# EAGLE board LoPoSwitch-BLE (EAGLE 6.6.0)
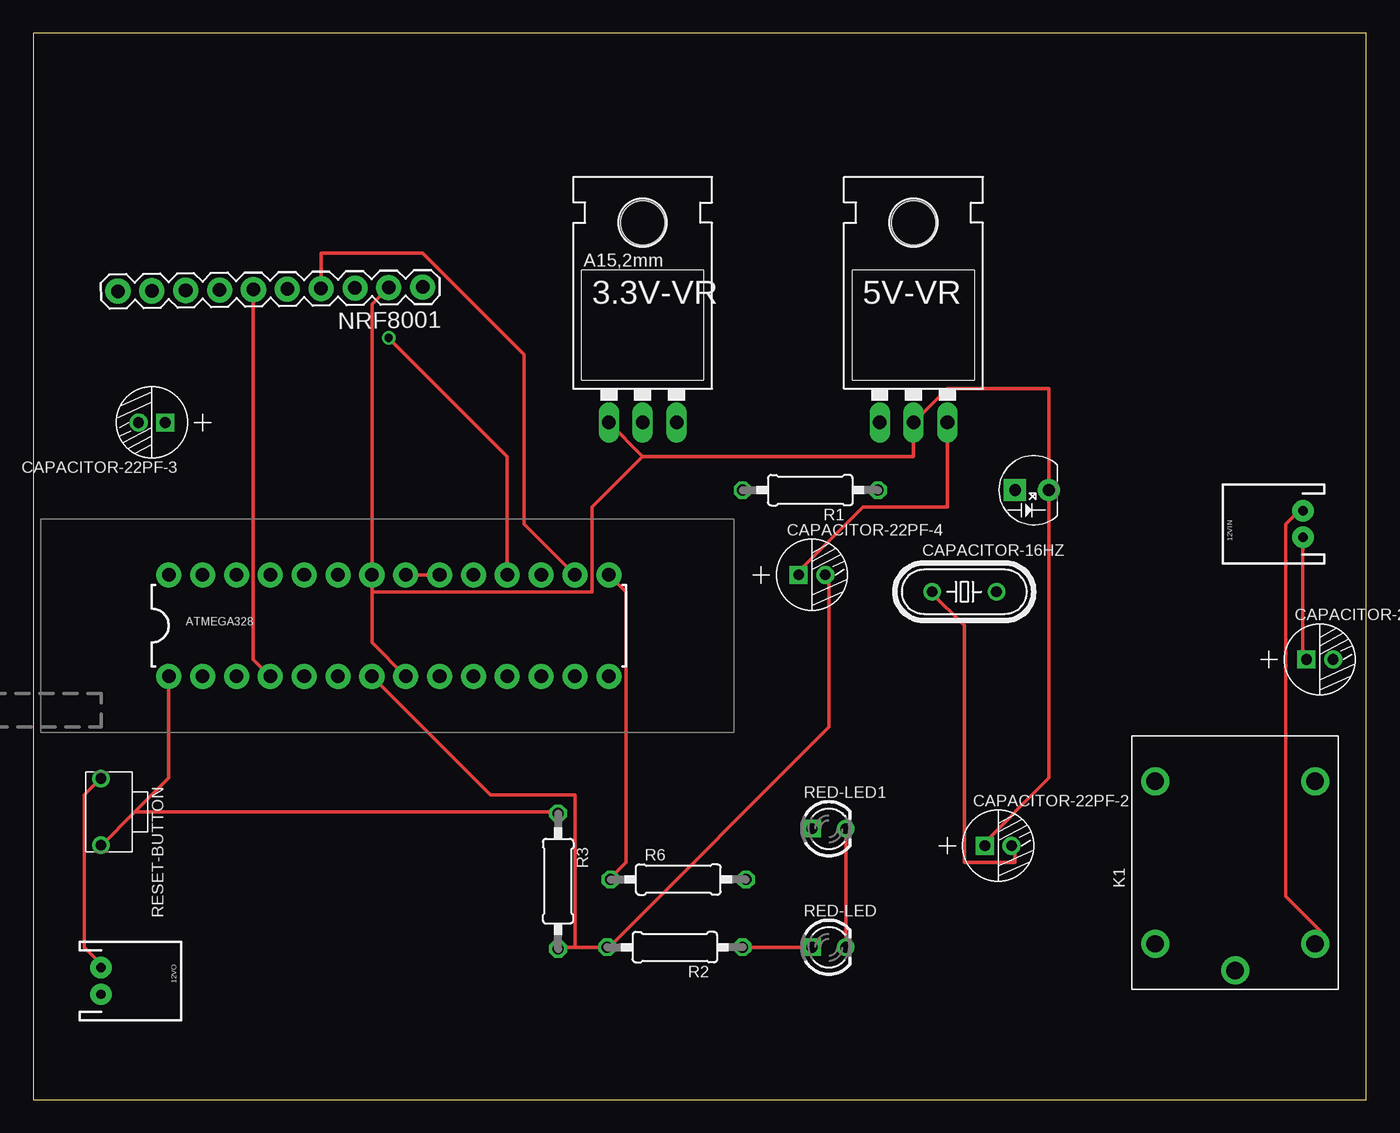
[diagram p0: board, top side]
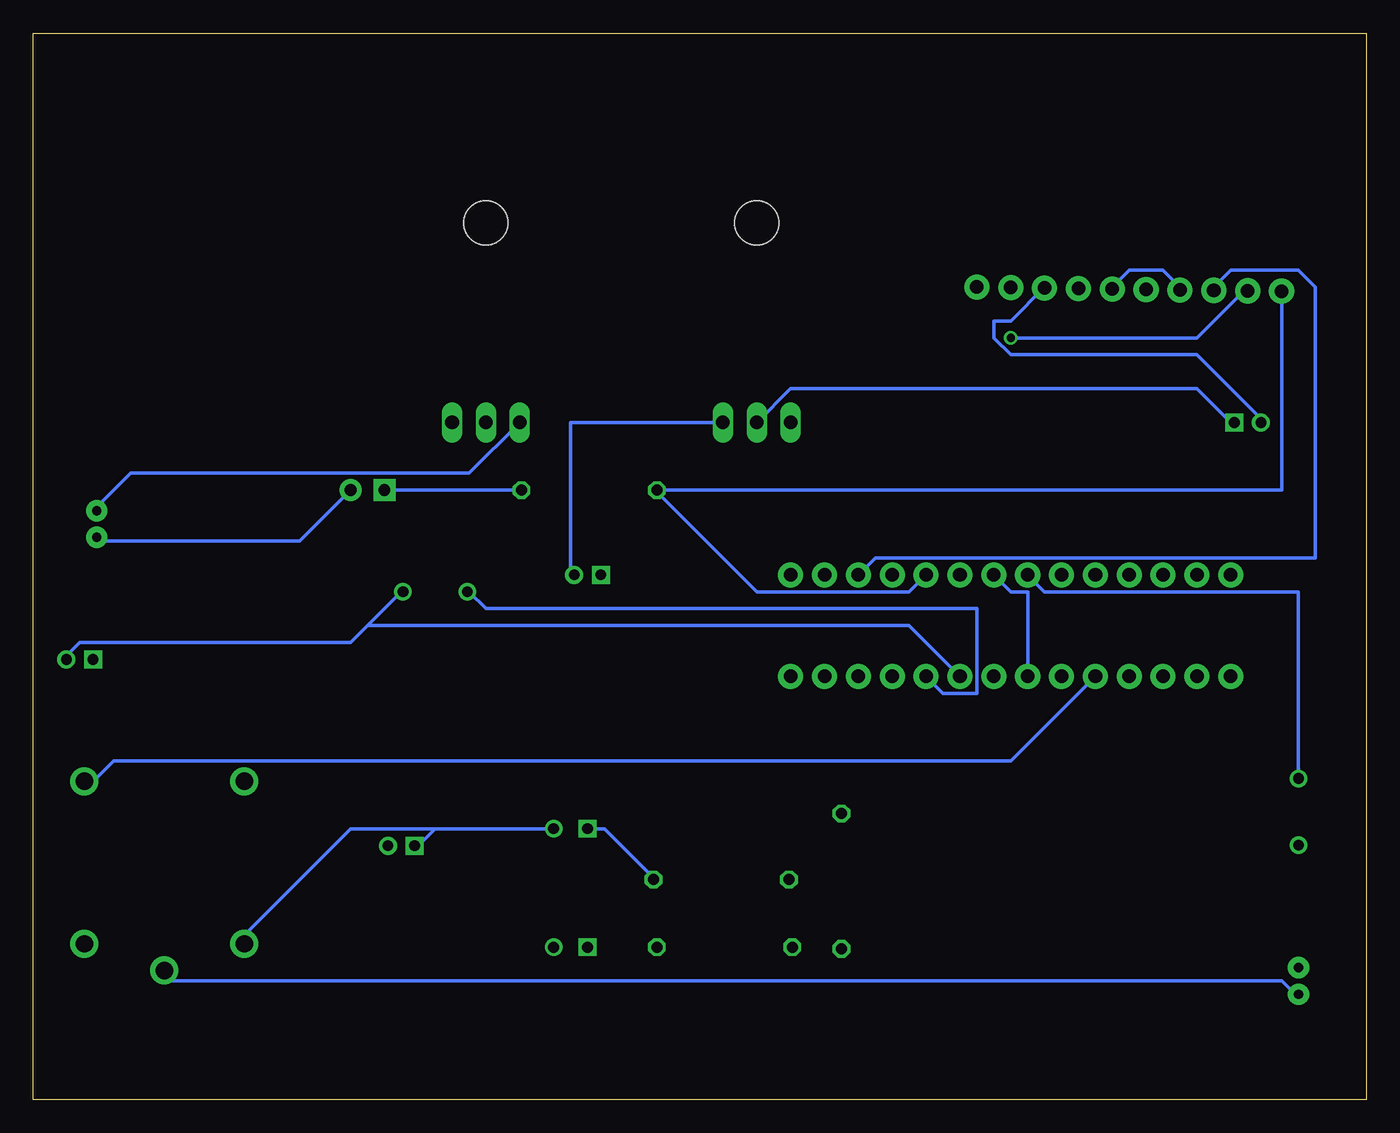
[diagram p1: board, bottom side, seen from below]

Size 100 x 80 mm. Coordinates in mm from the lower left corner, seen from the top.
Outline: 0,0 100,0 100,80 0,80 0,0
Copper layers (1*16): Top 0.035mm / dielectric 1.5mm / Bottom 0.035mm
Design rules "default": minimum track width 10mil, minimum drill 24mil, track to track 8mil, track to pad 8mil, pad to pad 8mil, via to via 8mil, smd to smd 8mil, copper to edge 40mil, drill to drill 8mil, minimum pad ring 10mil, minimum via ring 8mil, stop-mask expansion 4mil, vias tented up to drill 0mil, thermal gap 10mil

## Footprints (pad centres in the part's own frame; a part is rotated, then mirrored left to right if it is on the bottom)
78XXL = drill 1.016 long: GND 0,-3.81; IN -2.54,-3.81; OUT 2.54,-3.81 | hole 3.302: 0,11.176
TO-220-ALT = drill 1.016 long: GND 0,-3.81; IN -2.54,-3.81; OUT 2.54,-3.81 | hole 3.302: 0,11.176
JST-2-PTH = drill 0.7 pad 1.6: 1 -1,0; 2 1,0
DIL28-3-ZIF_SOCKET = drill 1.016 pad 1.88: 1 -16.51,-3.81; 2 -13.97,-3.81; 3 -11.43,-3.81; 4 -8.89,-3.81; 5 -6.35,-3.81; 6 -3.81,-3.81; 7 -1.27,-3.81; 8 1.27,-3.81; 9 3.81,-3.81; 10 6.35,-3.81; 11 8.89,-3.81; 12 11.43,-3.81; 13 13.97,-3.81; 14 16.51,-3.81; 15 16.51,3.81; 16 13.97,3.81; 17 11.43,3.81; 18 8.89,3.81; 19 6.35,3.81; 20 3.81,3.81; 21 1.27,3.81; 22 -1.27,3.81; 23 -3.81,3.81; 24 -6.35,3.81; 25 -8.89,3.81; 26 -11.43,3.81; 27 -13.97,3.81; 28 -16.51,3.81
HC49US = drill 0.813: 1 -2.413,0; 2 2.413,0
PC-D5.3MM = drill 0.8 pad 1.35 square: + -1,0 | drill 0.8 pad 1.35: - 1,0
LED2-2.54-D5.0MM = drill 0.889 pad 1.651 square: + -1.27,0 | drill 0.889 pad 1.651: - 1.27,0
REY5-19.0X15.0X15.0MM = drill 1.3 pad 2.1: 1 -8.1,0; 2 -6.1,-6; 3 -6.1,6; 4 6.1,-6; 5 6.1,6
1X10 = drill 1.016 pad 1.88: 1 0,0; 2 2.54,0; 3 5.08,0; 4 7.62,0; 5 10.16,0; 6 12.7,0; 7 15.24,0; 8 17.78,0; 9 20.32,0; 10 22.86,0
PR-D2.3XL6.5MM = drill 0.813 octagon: 1 -4.953,0; 2 5.207,0
LED2-2.54-D3.0MM = drill 0.813 square: A -1.27,0 | drill 0.813: K 1.27,0
SW2-5.0-6.0X3.0X4.3MM = drill 0.8 pad 1.27: 1 -2.5,0; 2 2.5,0

## Placement (x,y rotation side)
3.3V-VR  V_REG_LD1117VXX  [78XXL]  45.72,54.61 0 top
5V-VR  5V  [TO-220-ALT]  66.04,54.61 0 top
12VIN  12V  [JST-2-PTH]  95.25,43.18 90 top
12VO  12V  [JST-2-PTH]  5.08,8.89 270 top
ATMEGA328  ZIFSOCKET-28-3ZIFFSOCKET-28-3  [DIL28-3-ZIF_SOCKET]  26.67,35.56 0 top
CAPACITOR-16HZ  16MHZ  [HC49US]  69.85,38.1 0 top
CAPACITOR-22PF-1  100uf  [PC-D5.3MM]  96.52,33.02 0 top
CAPACITOR-22PF-2  100uf  [PC-D5.3MM]  72.39,19.05 0 top
CAPACITOR-22PF-3  100uf  [PC-D5.3MM]  8.89,50.8 180 top
CAPACITOR-22PF-4  100uf  [PC-D5.3MM]  58.42,39.37 0 top
D1  504BW  [LED2-2.54-D5.0MM]  74.93,45.72 0 top
K1  12V  [REY5-19.0X15.0X15.0MM]  90.17,17.78 90 top
NRF8001  3.3V  [1X10]  29.21,60.96 180.8 top
R1  220R  [PR-D2.3XL6.5MM]  58.42,45.72 180 top
R2  220R  [PR-D2.3XL6.5MM]  48.26,11.43 180 top
R3  1M  [PR-D2.3XL6.5MM]  39.37,16.51 270 top
R6  220R  [PR-D2.3XL6.5MM]  48.26,16.51 0 top
RED-LED  SR302DC  [LED2-2.54-D3.0MM]  59.69,11.43 0 top
RED-LED1  SR302DC  [LED2-2.54-D3.0MM]  59.69,20.32 0 top
RESET-BUTTON  TS-1101F  [SW2-5.0-6.0X3.0X4.3MM]  5.08,21.59 270 top

## Library data of the parts
3.3V-VR = SparkFun-PowerIC
5V-VR = SparkFun-PowerIC; PROD_ID: VREG-08450; SF_ID: COM-00107
12VIN 12VO = SparkFun-Connectors; PROD_ID: CONN-09863; SKU: PRT-09914
ATMEGA328 = SparkFun-Connectors
CAPACITOR-16HZ = Seeed-Crystal Oscillator; MPN: 49S/18PF
CAPACITOR-22PF-1-CAPACITOR-22PF-4 = Seeed-Capacitor; MPN: KS 100uF/16V
D1 = Seeed-LED; MPN: 504BW
K1 = Seeed-Relay
NRF8001 = SparkFun-Connectors; PROD_ID: CONN-11563
R1 R2 R6 = Seeed-Resistor; MPN: FHCFR-1/4W-221J
R3 = Seeed-Resistor; MPN: FHCFR-1/4W-105J
RED-LED RED-LED1 = Seeed-LED; MPN: SR302DC
RESET-BUTTON = Seeed-Switch; MPN: TS-1101F

## Nets
3.3VIN: CAPACITOR-22PF-3.- NRF8001.3
5VIN: 3.3V-VR.OUT ATMEGA328.7 ATMEGA328.20 ATMEGA328.21 CAPACITOR-22PF-4.- R2.2 R3.2
12VIN: 5V-VR.IN 12VIN.2 K1.2
ACT: NRF8001.5 NRF8001.7
ARDUINO.D3: ATMEGA328.5 K1.4
GND: 3.3V-VR.IN 5V-VR.GND 12VIN.1 12VO.1 ATMEGA328.8 ATMEGA328.22 CAPACITOR-22PF-1.+ CAPACITOR-22PF-2.+ D1.- K1.3 NRF8001.2 RED-LED1.K RED-LED.K RESET-BUTTON.1
MISO: ATMEGA328.18 NRF8001.9
MOSI: ATMEGA328.17 NRF8001.8
N$1: 12VO.2 K1.1
N$2: R6.2 RED-LED1.A
N$3: ATMEGA328.1 R3.1 RESET-BUTTON.2
N$4: 3.3V-VR.GND CAPACITOR-22PF-3.+
N$5: 5V-VR.OUT CAPACITOR-22PF-4.+
N$7: D1.+ R1.1
N$8: R2.1 RED-LED.A
N$10: ATMEGA328.9 CAPACITOR-16HZ.2 CAPACITOR-22PF-1.-
N$11: ATMEGA328.10 CAPACITOR-16HZ.1 CAPACITOR-22PF-2.-
PIN13: ATMEGA328.15 R6.1
RDY: ATMEGA328.4 NRF8001.6
RST: ATMEGA328.16 NRF8001.4
SCK: ATMEGA328.19 NRF8001.10 R1.2

## Tracks (layer width: path | path; a pad name or v marks a point on that pad's centre or on a via)
3.3VIN
  Bottom 0.254: CAPACITOR-22PF-3.- 7.62,50.8 12.7,55.88 26.67,55.88 27.94,57.15 27.94,58.42 26.67,58.42 24.13,60.96 NRF8001.3
5VIN
  Top 0.254: ATMEGA328.21 ATMEGA328.20 | 40.64,11.43 R2.2 43.18,11.43 59.69,27.94 59.69,39.37 CAPACITOR-22PF-4.- | 40.64,11.43 39.37,11.43 R3.2 | ATMEGA328.7 34.29,22.86 40.64,22.86 40.64,11.43
  Bottom 0.254: ATMEGA328.7 25.4,38.1 26.67,38.1 ATMEGA328.21 | 3.3V-VR.OUT 59.69,50.8 59.69,39.37 CAPACITOR-22PF-4.-
12VIN
  Top 0.254: K1.2 96.52,12.7 93.98,15.24 93.98,43.18 95.25,44.45 12VIN.2
  Bottom 0.254: 5V-VR.IN 67.31,46.99 92.71,46.99 95.25,44.45 12VIN.2
ACT
  Bottom 0.254: NRF8001.7 13.97,60.96 15.24,62.23 17.78,62.23 19.05,60.96 NRF8001.5
ARDUINO.D3
  Bottom 0.254: ATMEGA328.5 26.67,25.4 93.98,25.4 95.25,24.13 K1.4
GND
  Top 0.254: RESET-BUTTON.1 5.08,24.13 3.81,22.86 3.81,11.43 5.08,10.16 12VO.1 | ATMEGA328.8 25.4,34.29 25.4,38.1 | 25.4,38.1 ATMEGA328.22 25.4,59.69 26.67,60.96 NRF8001.2 | RED-LED1.K RED-LED.K | 45.72,48.26 3.3V-VR.IN | 45.72,48.26 66.04,48.26 5V-VR.GND 68.58,53.34 76.2,53.34 D1.- | 12VIN.1 95.25,33.02 CAPACITOR-22PF-1.+ | D1.- 76.2,24.13 71.12,19.05 CAPACITOR-22PF-2.+ | D1.- | 25.4,38.1 41.91,38.1 41.91,44.45 45.72,48.26
  Bottom 0.254: RESET-BUTTON.1 5.08,38.1 24.13,38.1 ATMEGA328.22 | 69.85,20.32 71.12,19.05 CAPACITOR-22PF-2.+ | RED-LED1.K 69.85,20.32 | 69.85,20.32 76.2,20.32 83.82,12.7 K1.3 | D1.- 80.01,41.91 95.25,41.91 12VIN.1 | D1.-
MISO  (via drill 0.61)
  Top 0.254: v26.67,57.15 35.56,48.26 ATMEGA328.18
  Bottom 0.254: v26.67,57.15 12.7,57.15 8.89,60.96 NRF8001.9
MOSI
  Bottom 0.254: ATMEGA328.17 36.83,40.64 3.81,40.64 3.81,60.96 5.08,62.23 10.16,62.23 11.43,60.96 NRF8001.8
N$1
  Bottom 0.254: 12VO.2 5.08,7.62 6.35,8.89 90.17,8.89 K1.1
N$2
  Bottom 0.254: RED-LED1.A 57.15,20.32 53.34,16.51 R6.2
N$3
  Top 0.254: 7.62,21.59 10.16,24.13 ATMEGA328.1 | 7.62,21.59 5.08,19.05 RESET-BUTTON.2 | 7.62,21.59 39.37,21.59 R3.1
N$4
  Bottom 0.254: 3.3V-VR.GND 43.18,53.34 12.7,53.34 10.16,50.8 CAPACITOR-22PF-3.+
N$5
  Top 0.254: 5V-VR.OUT 68.58,44.45 62.23,44.45 57.15,39.37 CAPACITOR-22PF-4.+
N$7
  Bottom 0.254: D1.+ R1.1
N$8
  Top 0.254: RED-LED.A R2.1
N$10
  Bottom 0.254: 74.93,35.56 76.2,34.29 96.52,34.29 97.79,33.02 CAPACITOR-22PF-1.- | 74.93,35.56 72.39,38.1 CAPACITOR-16HZ.2 | ATMEGA328.9 34.29,35.56 74.93,35.56
N$11
  Top 0.254: CAPACITOR-16HZ.1 67.31,38.1 69.85,35.56 69.85,17.78 73.66,17.78 73.66,19.05 CAPACITOR-22PF-2.-
  Bottom 0.254: ATMEGA328.10 31.75,30.48 29.21,30.48 29.21,36.83 66.04,36.83 67.31,38.1 CAPACITOR-16HZ.1
PIN13
  Top 0.254: ATMEGA328.15 44.45,38.1 44.45,17.78 43.18,16.51 R6.1
RDY
  Top 0.254: ATMEGA328.4 16.51,33.02 16.51,60.96 NRF8001.6
RST
  Top 0.254: ATMEGA328.16 36.83,43.18 36.83,55.88 29.21,63.5 21.59,63.5 21.59,60.96 NRF8001.4
SCK
  Bottom 0.254: ATMEGA328.19 34.29,38.1 45.72,38.1 53.34,45.72 R1.2 6.35,45.72 6.35,60.96 NRF8001.10